# Altium PCB foot.PcbDoc
Units mil, origin at the board's own origin, x right, y up, seen from the top; angles counter-clockwise.
Board outline 8740.16 x 787.4 mil, 2 copper layers (Top Layer, Bottom Layer); 4 components, 0 nets, 41 pads, 0 vias.
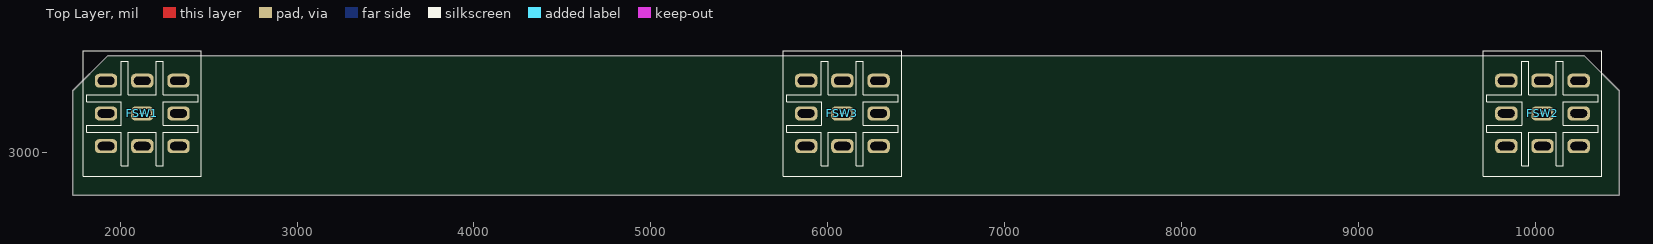
[diagram p0: Top Layer view]
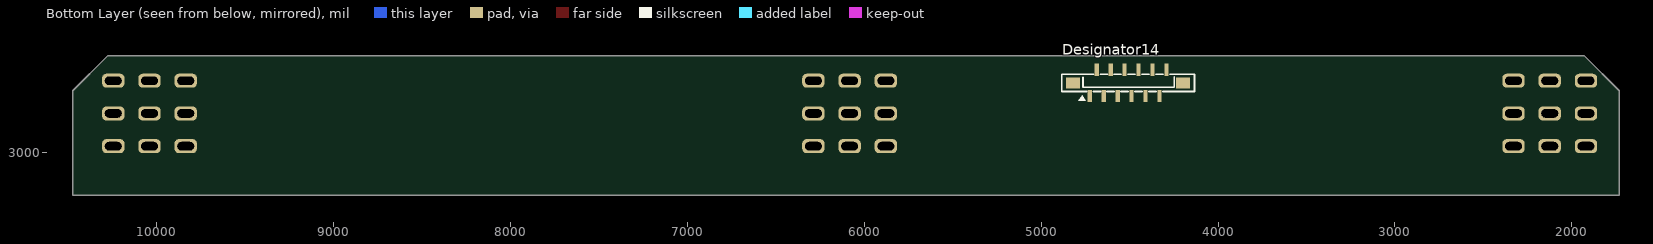
[diagram p1: Bottom Layer view, seen from below]

## Layer stack, top to bottom
Top Solder: solder mask 0.4, Solder Resist, Dk 3.5
Top Layer: signal copper 1.4
Dielectric 1: dielectric 12.6, FR-4, Dk 4.8
Bottom Layer: signal copper 1.4
Bottom Solder: solder mask 0.4, Solder Resist, Dk 3.5

## Board outline
1732.28,2755.91 1732.28,3346.46 1929.13,3543.31 10275.59,3543.31 10472.44,3346.46 10472.44,2755.91

## Design rules (kind name [scope] priority, off if disabled: settings)
Clearance [All] p1: gap=10 ignorepadtopadclearanceinfootprint=FALSE except(0: Arc-Hole Track-Hole SMDPad-Hole THPad-Hole Via-Hole Fill-Hole Poly-Hole Region-Hole Text-Hole)
PolygonConnect [All] p1: connectstyle=Relief reliefconductorwidth=10 reliefentries=4 polygonreliefangle="90 Angle" airgapwidth=10
RoutingVias [All] p1: holewidth=28 width=50 viastyle="Through Hole" minholewidth=28 minwidth=50 maxholewidth=28 maxwidth=50
SolderMaskExpansion [All] p1: expansion=4 istentingtop=FALSE
Width [All] p1: maxlimit=10 minlimit=10 preferedwidth=10
30 further rules are at their usual default settings.

## Components (designator, comment, footprint, x,y, rotation, side; value= is the part's Value field where it differs from the comment)
Designator14 "Comment" AFA11-S12GLA-00 4724.41,3316.93 r180 bottom
FSW1 "FootSwitch" FOOTSW 1920.53,3403.05 r270 top
FSW2 "FootSwitch" FOOTSW 9833.91,3403.05 r270 top
FSW3 "FootSwitch" FOOTSW 5877.22,3403.05 r270 top (schematic designator FSW2)

## Footprints (in the part's own frame and the unit in brackets; to place one, negate y for a bottom-side part, rotate by r counter-clockwise, add the part's x,y. Pads: shape width x height; smd on the part's side, far side on the other; paste and mask are expansions set on the pad)
AFA11-S12GLA-00 [mm]
  rect 0.6x1.75 smd paste+0 mask+0.05: 1(0,0) 2(1,3.75) 3(2,0) 4(3,3.75) 5(4,0) 6(5,3.75) 7(6,0) 8(7,3.75) 9(8,0) 10(9,3.75) 11(10,0) 12(11,3.75)
  rect 2x1.6 smd paste+0 mask+0.05: 13(13.4,1.875) 14(-2.4,1.875)
  silkscreen extent -4.04,-0.66 15.04,3.13, body extent -3.69,-0.35 14.71,4.16, height 5.35
FOOTSW [mm]
  rrect60% 2x3.2 hole 1.2 slot 2.4 at 90 deg: 1(0,0) 2(4.7,0) 3(9.4,0) 4(0,5.2) 5(4.7,5.2) 6(9.4,5.2) 7(0,10.4) 8(4.7,10.4) 9(9.4,10.4)
  silkscreen extent -4.3,-3.3 13.7,13.7, body extent -3.81,-4.59 13.19,15.01, height 39.54

## Nets (pads, with @x,y where several pads share a name; then routed paths per layer and width w, separated by ;. In a path a pad name is that pad's centre, name@x,y a point inside that pad or via, vN(x,y) a via of type N, cw(c..) or ccw(c..) an arc to the next point about the centre after c; other vN are vias at no path point)
pads on no net: Designator14.1 Designator14.2 Designator14.3 Designator14.4 Designator14.5 Designator14.6 Designator14.7 Designator14.8 Designator14.9 Designator14.10 Designator14.11 Designator14.12 Designator14.13 Designator14.14 FSW1.1 FSW1.2 FSW1.3 FSW1.4 FSW1.5 FSW1.6 FSW1.7 FSW1.8 FSW1.9 FSW2.1 FSW2.2 FSW2.3 FSW2.4 FSW2.5 FSW2.6 FSW2.7 FSW2.8 FSW2.9 FSW3.1 FSW3.2 FSW3.3 FSW3.4 FSW3.5 FSW3.6 FSW3.7 FSW3.8 FSW3.9

## Silkscreen, mask and mechanical layers (free items; w line width, h text height)
Mechanical 4:
  circle w0.5: c6081.94,3218.02 r236.22
  circle w0.5: c2125.25,3218.02 r236.22
  circle w0.5: c10038.64,3218.02 r236.22
  lines w0.5: 3023.96,2982.87 ccw(c3063.33,2982.87) 3063.33,2943.5 5150.73,2943.5 ccw(c5150.73,2982.87) 5190.1,2982.87 5190.1,3419.88 ccw(c5150.73,3419.88) 5150.73,3459.25 3063.33,3459.25 ccw(c3063.33,3419.88) 3023.96,3419.88 3023.96,2982.87 ; 6973.79,2982.87 ccw(c7013.16,2982.87) 7013.16,2943.5 9100.56,2943.5 ccw(c9100.56,2982.87) 9139.93,2982.87 9139.93,3419.88 ccw(c9100.56,3419.88) 9100.56,3459.25 7013.16,3459.25 ccw(c7013.16,3419.88) 6973.79,3419.88 6973.79,2982.87
  lines w1: 10470,2641.83 3070.13,2641.83 3070.13,3606.99 10470,3606.99
  lines w5: 10470,2641.83 10470,3606.99
  lines w10: 1732.28,2755.91 1732.28,3346.46 1929.13,3543.31 10275.59,3543.31 10472.44,3346.46 10472.44,2755.91 1732.28,2755.91